# Altium PCB PCB1.PcbDoc (part 2 of 2)
Units mil, origin at the board's own origin, x right, y up, seen from the top; angles counter-clockwise.
Board outline 2362.2 x 2362.2 mil, 2 copper layers (Top Layer, Bottom Layer); 153 components, 106 nets, 570 pads, 334 vias.
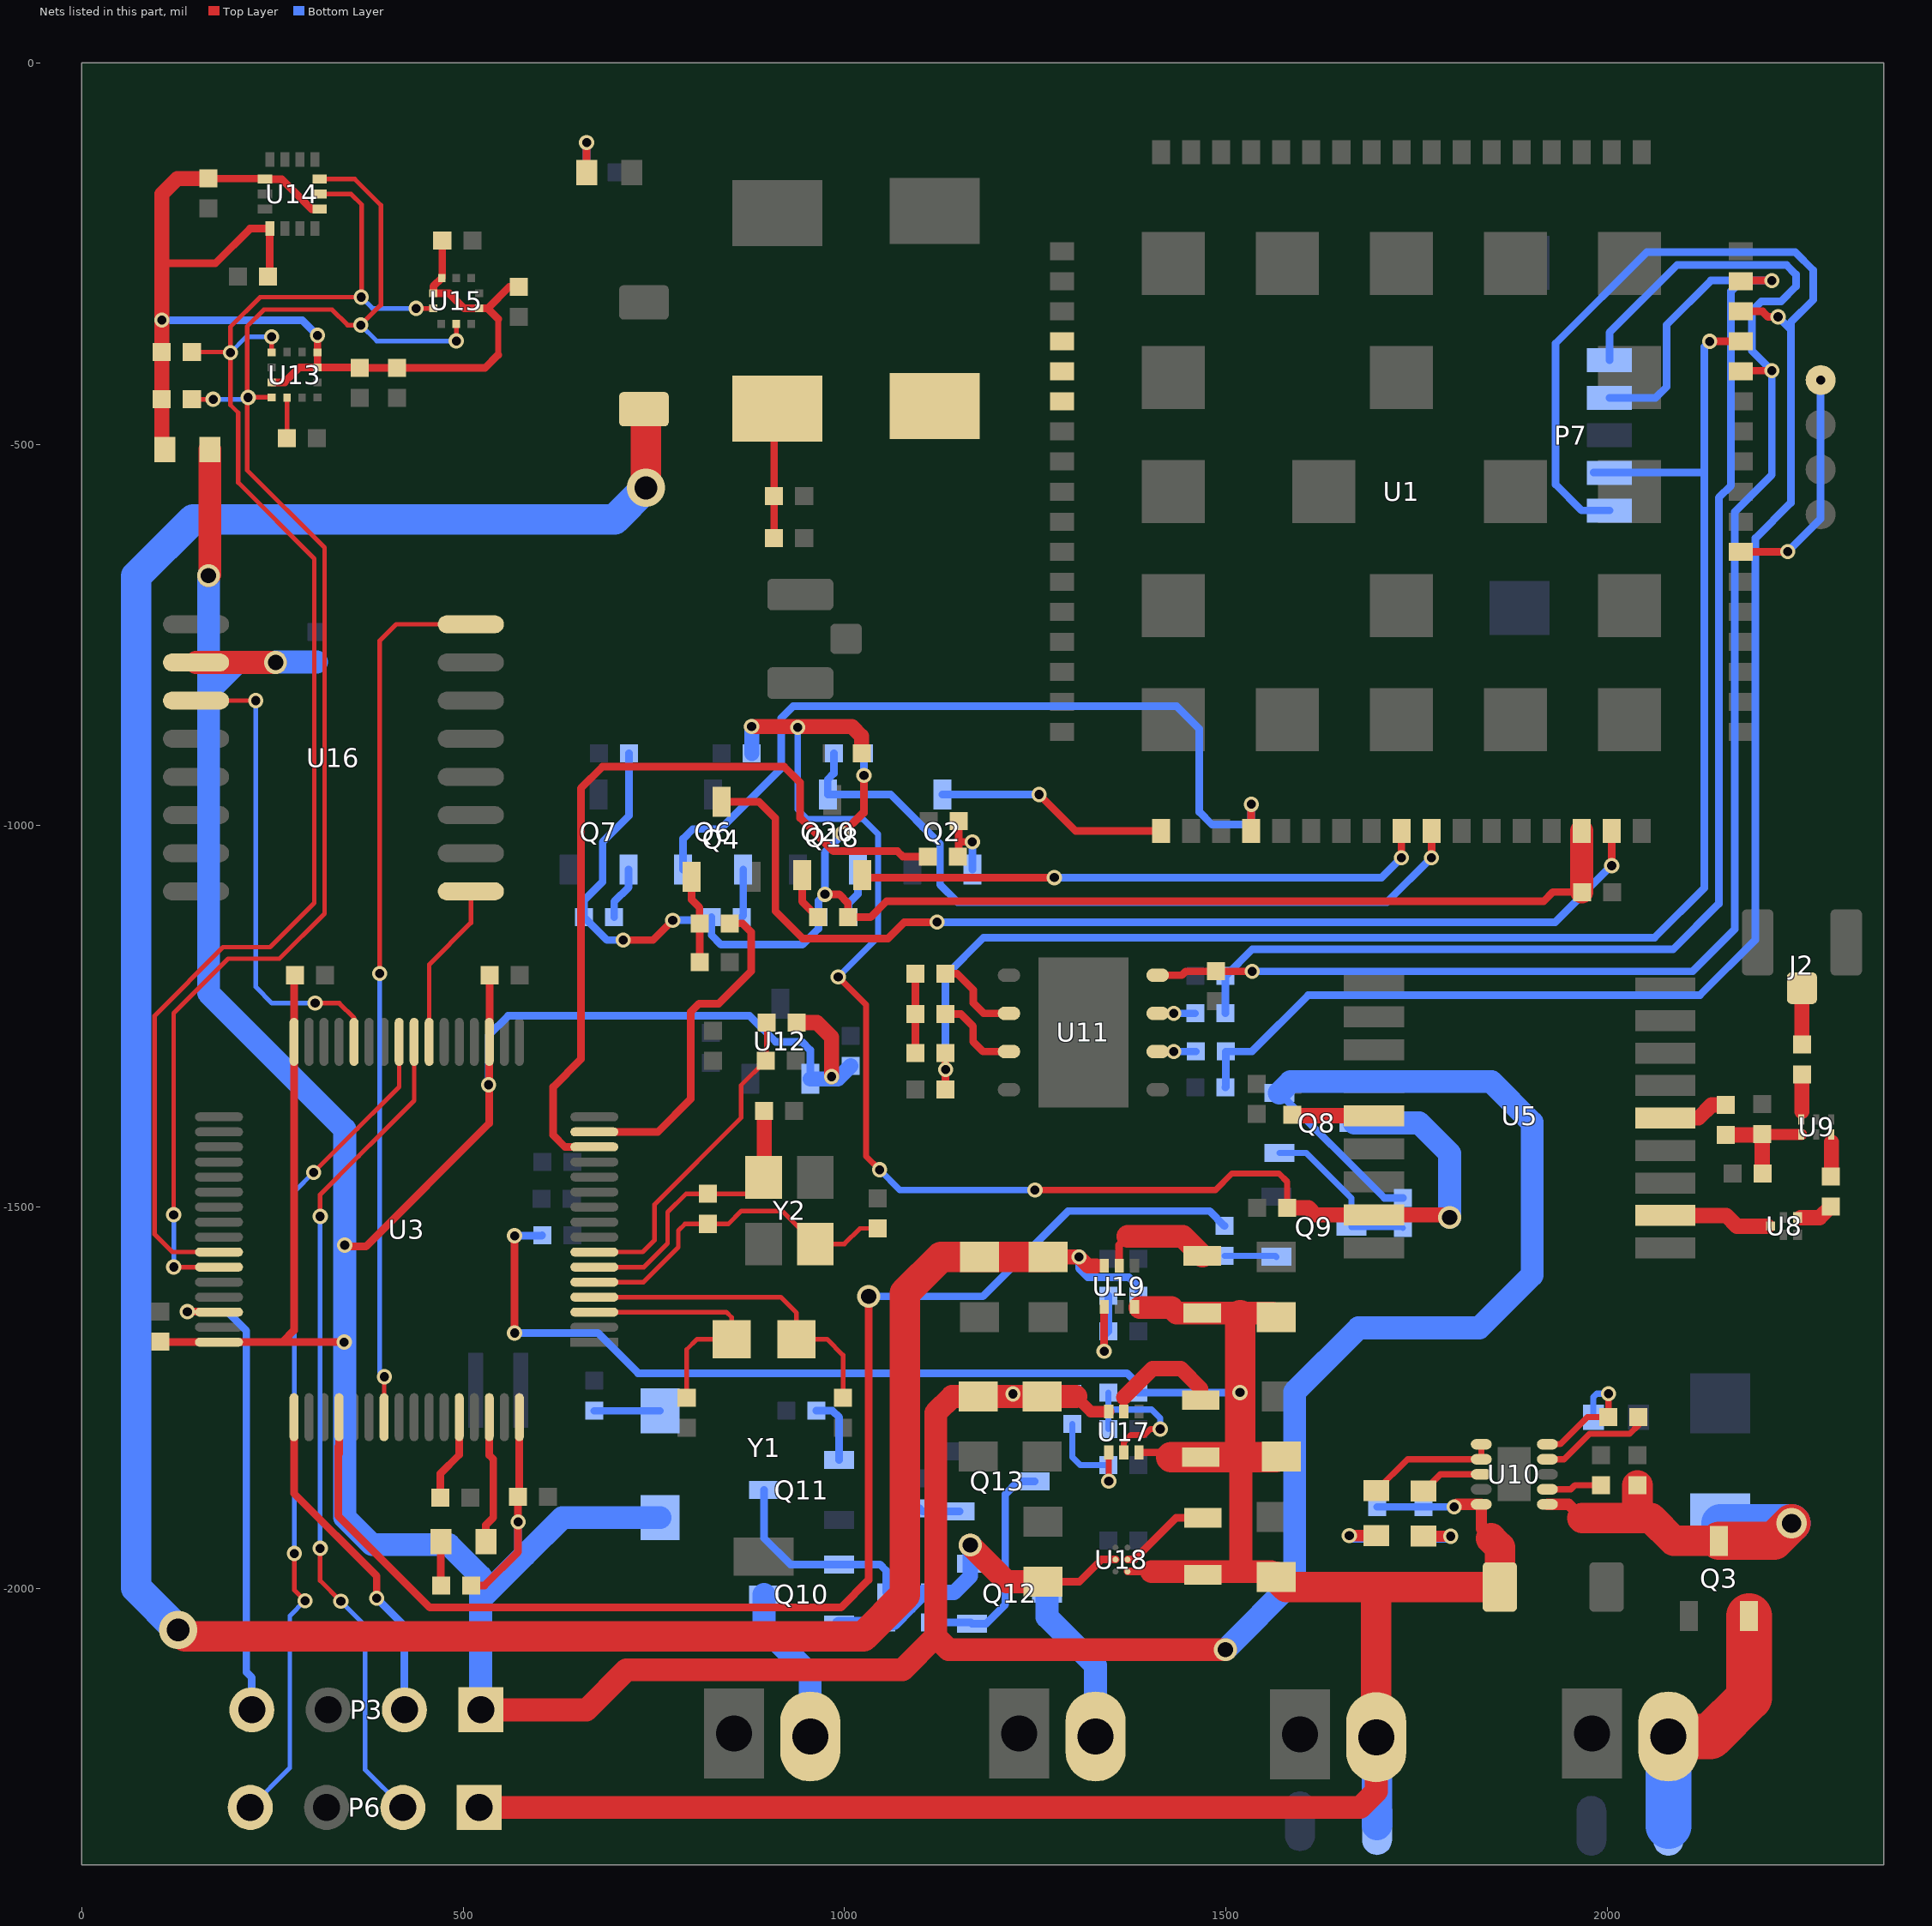
[diagram p2: the nets of this part, all layers, seen from the top]

## Via types
v1: diameter 20, hole 12, Top Layer to Bottom Layer, tented both sides, 324 vias
v2: diameter 30, hole 20, Top Layer to Bottom Layer, tented both sides, 6 vias
v3: diameter 50, hole 30, Top Layer to Bottom Layer, tented both sides, 2 vias
v4: diameter 25.98, hole 12.99, Top Layer to Bottom Layer, tented top, 1 vias
v5: diameter 40, hole 25, Top Layer to Bottom Layer, tented both sides, 1 vias

## Nets (pads, with @x,y where several pads share a name; then routed paths per layer and width w, separated by ;. In a path a pad name is that pad's centre, name@x,y a point inside that pad or via, vN(x,y) a via of type N, cw(c..) or ccw(c..) an arc to the next point about the centre after c; other vN are vias at no path point) (continued)
NetC4_2: C4.2 R1.1 U3.5 Y2.1 | length 449.3
  Top Layer w6: U3.5@672,-1598.26 736.31,-1598.26 782.09,-1552.48 782.09,-1530.83 790.91,-1522 R1.1@821,-1522 847.72,-1522 864.76,-1504.96 918.12,-1504.96 Y2.1@961.46,-1548.31 999.76,-1548.31 1020.12,-1527.95 C4.2@1043.62,-1527.95
NetC5_1: C5.1 U3.4 Y1.2 | length 433.6
  Top Layer w6: U3.4@672,-1617.94 916.37,-1617.94 937,-1638.57 Y1.2@937,-1673 976.9,-1673 998,-1694.1 C5.1@998,-1750
NetC6_2: C6.2 R1.2 U3.6 Y2.3 | length 381.8
  Top Layer w6: U3.6@672,-1578.57 736.94,-1578.57 768.07,-1547.44 768.07,-1506.69 792.13,-1482.63 R1.2@821,-1482.63 872.37,-1482.63 Y2.3@894,-1461
  Top Layer w20: Y2.3@894,-1461 894.63,-1460.37 C6.2@894.63,-1374
NetC7_1: C7.1 U3.3 Y1.1 | length 339.3
  Top Layer w6: U3.3@672,-1637.63 845.07,-1637.63 852,-1644.56 Y1.1@852,-1673 806.69,-1673 793,-1686.69 C7.1@793,-1750
NetC8_2: C8.2 R6.2 U3.7 | length 431.4
  Top Layer w6: U3.7@672,-1558.89 735.28,-1558.89 750.91,-1543.27 750.91,-1496.34 864.41,-1382.83 864.41,-1340.22 C8.2@896.63,-1308 897.63,-1307 R6.2@897.63,-1258
NetC22_1: C22.1 U8.4 | length 45.8
  Top Layer w20: U8.4@2253.31,-1513.68 2278.32,-1513.68 C22.1@2293,-1499
NetC22_2: C22.2 U9.6 | length 45.2
  Top Layer w20: C22.2@2293,-1459.63 2293.69,-1458.95 2293.69,-1414.68
NetC27_1: C27.1 D2.2 Q3.3 U10.1 | length 486.7
  Top Layer w15: U10.1@1921.31,-1889.56 1949.2,-1889.56 1967.28,-1907.64
  Top Layer w40: 1967.28,-1907.64 2041.61,-1907.64 ; C27.1@2039.37,-1864.76 2039.37,-1905.39 2041.61,-1907.64 ; Q3.3@2146.37,-1937.57 2087.1,-1937.57 2057.17,-1907.64 2041.61,-1907.64
  Top Layer w50: Q3.3@2146.37,-1937.57 2218.28,-1937.57 v5(2241.37,-1914.48)
  Bottom Layer w50: D2.2@2148,-1914.48 v5(2241.37,-1914.48)
NetC40_1: C40.1 U13.5 | length 53
  Top Layer w6: C40.1@269,-492 269.16,-491.84 U13.5@269.16,-439.02
NetD1_2: D1.2 R7.1 | length 86
  Bottom Layer w10: R7.1@672,-1767 D1.2@758,-1767
NetJ2_1: J2.1 L3.2 | length 73.6
  Top Layer w20: L3.2@2255,-1286.63 J2.1@2255,-1213.04
NetL2_1: L2.1 U5.14 | length 86.2
  Top Layer w20: U5.14@2075.89,-1383.23 2119.45,-1383.23 2136.68,-1366 L2.1@2155,-1366
NetL3_1: L3.1 U9.3 | length 48.8
  Top Layer w20: 2255,-1374.76 L3.1@2255,-1326
NetL4_1: L4.1 U17.5 | length 161.4
  Top Layer w10: U17.5@1366,-1768 1366,-1749.28
  Top Layer w20: 1366,-1749.28 1403.62,-1711.65 1440.91,-1711.65 1466.99,-1737.74 L4.1@1466.99,-1753.05
NetL5_2: L5.2 U18.B1 | length 121.6
  Top Layer w10: U18.B1@1370.87,-1962 1379.96,-1962 1434.76,-1907.2 L5.2@1469.74,-1907.2
NetL6_1: L6.1 U19.5 | length 151.6
  Top Layer w10: U19.5@1360,-1577 1360,-1549.72 1371.38,-1538.35
  Top Layer w30: 1371.38,-1538.35 1428.43,-1538.35 1443.35,-1538.35 L6.1@1469,-1564
NetLED1_2: LED1.2 R9.1 | length 78.5
  Top Layer w10: LED1.2@661.88,-143.75 v1(661.88,-104.48)
  Bottom Layer w10: R9.1@661.88,-143.75 v1(661.88,-104.48)
NetLED2_1: LED2.1 R29.2 | length 72.8
  Top Layer w15: v1(1661.58,-1930.51) LED2.1@1697.2,-1930.51
  Bottom Layer w15: v1(1661.58,-1930.51) 1663.44,-1932.37 R29.2@1698,-1932.37
NetLED2_2: LED2.2 U10.6 U10.7 | length 174.1
  Top Layer w8: LED2.2@1697.2,-1871.45 1738.16,-1830.5 U10.7@1834.69,-1830.5 U10.6@1834.69,-1810.82
NetLED4_1: LED4.1 R12.2 | length 71.7
  Top Layer w15: LED4.1@1759,-1931.4 v1(1794.62,-1931.4)
  Bottom Layer w15: R12.2@1759,-1932.37 1793.65,-1932.37 v1(1794.62,-1931.4)
NetLED4_2: LED4.2 U10.8 | length 84.9
  Top Layer w8: LED4.2@1759,-1872.34 1781.16,-1850.19 U10.8@1834.69,-1850.19
NetLED5_1: LED5.1 R65.1 | length 57.6
  Top Layer w10: LED5.1@470.67,-1938.58 470.67,-1995.67 R65.1@471,-1996
NetLED5_2: LED5.2 U3.62 | length 169.4
  Top Layer w10: LED5.2@529.72,-1938.58 529.72,-1916.57 539.49,-1906.81 539.49,-1830.39 534.2,-1825.11 U3.62@534.2,-1775.43
NetQ2_1: Q2.1 R10.1 R11.1 | length 101.8
  Top Layer w10: R10.1@1148.51,-1040.78 1149.51,-1039.78 1149.51,-1020.98 ; R11.1@1149.51,-993.78 1149.51,-1020.98 ; v1(1167.5,-1021.16) 1149.69,-1021.16 1149.51,-1020.98
  Bottom Layer w10: Q2.1@1167.5,-1057.51 v1(1167.5,-1021.16)
NetQ4_1: Q4.1 R4.1 R16.1 | length 116.4
  Top Layer w10: Q4.1@799.26,-1067 799.26,-1096.74 809.88,-1107.36 R16.1@809.88,-1128 810,-1128.12 R4.1@810,-1179
NetQ6_1: Q6.1 R28.1 | length 63.4
  Bottom Layer w10: R28.1@865,-1120 867.17,-1117.83 Q6.1@867.17,-1057.51
NetQ7_1: Q7.1 R31.1 | length 70.4
  Bottom Layer w10: R31.1@698,-1120 698,-1099.56 717,-1080.56 Q7.1@717,-1057.51
NetQ8_1: Q8.1 Q9.3 R33.2 | length 224.8
  Bottom Layer w8: Q8.1@1570,-1429 1605.22,-1429 1664.43,-1488.2 Q9.3@1664.43,-1525.89 1730.52,-1525.89 R33.2@1732,-1527.37
NetQ9_1: Q9.1 R34.1 | length 68.5
  Bottom Layer w8: R34.1@1498,-1564 1564.74,-1564 Q9.1@1566,-1565.26
NetQ10_1: Q10.1 Q11.3 R36.2 | length 269.3
  Bottom Layer w10: Q11.3@894.45,-1870.94 894.45,-1933.94 928.98,-1968.46 Q10.1@992.87,-1968.46 1046.5,-1968.46 1054.45,-1976.42 R36.2@1054.45,-2005.12
NetQ11_1: Q11.1 R37.1 | length 89.5
  Bottom Layer w10: R37.1@962.95,-1766.81 984.02,-1766.81 992.87,-1775.67 Q11.1@992.87,-1831.57
NetQ12_1: Q12.1 Q13.3 R50.2 | length 300
  Bottom Layer w10: R50.2@1112,-2044.37 1165.37,-2044.37 Q12.1@1167,-2046 1185.77,-2046 1210.63,-2021.14 1210.63,-1876.42 1227.6,-1859.45 Q13.3@1249.25,-1859.45
NetQ13_1: Q13.1 R51.1 | length 54
  Bottom Layer w10: R51.1@1098.46,-1894.92 1102.36,-1898.82 Q13.1@1150.83,-1898.82
NetQ18_1: Q18.1 R40.1 | length 63.6
  Top Layer w10: Q18.1@944.26,-1065 944.26,-1099.26 R40.1@965,-1120
NetQ20_1: Q20.1 R44.1 | length 67.6
  Bottom Layer w10: R44.1@1005,-1120 1005,-1102.01 1017.33,-1089.67 Q20.1@1017.33,-1057.51
NetR3_1: R3.1 U3.60 | length 115.9
  Top Layer w10: R3.1@470,-1881 470,-1849.49 494.83,-1824.65 U3.60@494.83,-1775.43
NetR13_1: R13.1 U10.2 | length 72.2
  Top Layer w8: U10.2@1921.31,-1869.87 1951.98,-1869.87 1957.09,-1864.76 R13.1@1991.37,-1864.76
NetR14_1: R14.1 R15.2 U10.5 | length 173.7
  Top Layer w8: U10.5@1921.31,-1810.82 1938.11,-1810.82 1973.54,-1775.39 R14.1@2001.37,-1775.39 v1(2001.37,-1744.52)
  Bottom Layer w8: R15.2@1981.69,-1775.39 1981.69,-1748.75 1985.91,-1744.52 v1(2001.37,-1744.52)
NetR14_2: R14.2 U10.4 | length 148.2
  Top Layer w8: U10.4@1921.31,-1830.5 1943.2,-1830.5 1976.66,-1797.04 2029.29,-1797.04 2040.74,-1785.59 R14.2@2040.74,-1775.39
NetR18_1: R18.1 U5.5 | length 107.5
  Top Layer w20: R18.1@1587,-1379 1588.23,-1380.23 U5.5@1694,-1380.23
NetR19_2: R19.2 R20.2 U19.1 | length 133.3
  Top Layer w10: v1(1340.32,-1688.82) U19.1@1340.32,-1630.57
  Bottom Layer w10: v1(1340.32,-1688.82) 1340.32,-1668.32 R20.2@1345.63,-1663 R19.2@1345.63,-1616
NetR21_2: R21.2 R48.2 U17.1 | length 153.8
  Top Layer w8: v1(1346.32,-1859.28) U17.1@1346.32,-1821.57
  Bottom Layer w8: R21.2@1298.74,-1784.29 1298.74,-1827.72 1309.02,-1838 R48.2@1345.63,-1838 1345.63,-1858.59 v1(1346.32,-1859.28)
NetR23_2: R23.2 U11.7 | length 49.2
  Top Layer w10: U11.7@1410.44,-1246 v1(1431.59,-1246)
  Bottom Layer w10: v1(1431.59,-1246) R23.2@1459.63,-1246
NetR25_1: R25.1 U11.3 | length 115.2
  Top Layer w10: R25.1@1132.41,-1247 1152.63,-1247 1168.5,-1262.87 1168.5,-1282.91 1181.59,-1296 1194.41,-1296 U11.3@1215.56,-1296
NetR25_2: R25.2 R26.2 R27.2 | length 104
  Top Layer w10: R27.2@1093.04,-1298 R25.2@1093.04,-1247 R26.2@1093.04,-1194
NetR26_1: R26.1 U11.2 | length 114.7
  Top Layer w10: R26.1@1132.41,-1194 1147.43,-1194 1168.79,-1215.37 1168.79,-1232.38 1182.42,-1246 U11.2@1215.56,-1246
NetR35_2: R35.2 R49.2 U17.2 | length 200.7
  Top Layer w8: U17.2@1366,-1821.57 1366,-1808.07 1375.14,-1798.93 1392.73,-1798.93 1400.79,-1790.87 v1@1410.98,-1790.87
  Bottom Layer w8: R35.2@1345.63,-1791 1345.63,-1765.32 ; R49.2@1345.63,-1743 1345.63,-1755.11 1345.63,-1765.32 ; v1(1413.74,-1790.87) 1413.74,-1776.62 1402.44,-1765.32 1345.63,-1765.32
NetR39_2: R39.2 U11.6 | length 50.2
  Top Layer w10: U11.6@1410.44,-1296 v1(1431.59,-1296)
  Bottom Layer w10: v1(1431.59,-1296) R39.2@1460.63,-1296
POWER_CTRL_GPS: R34.2 U3.52 | length 1790.6
  Top Layer w10: 336.22,-1814.17 336.22,-1904.72 456.38,-2024.88 767.95,-2024.88 995.28,-2024.88 1031.5,-1988.66 v2(1031.5,-1617.01) ; 337.35,-1822.84 U3.52@337.35,-1775.43
  Bottom Layer w10: v2(1031.5,-1617.01) 1181.14,-1617.01 1292.99,-1505.16 1302.13,-1505.16 1478.53,-1505.16 R34.2@1498,-1524.63
PWRKEY: Q2.3 U1.1 | length 312.1
  Top Layer w10: v1(1255.08,-959.09) 1302.87,-1006.88 1385.39,-1006.88 ; 1380.03,-1006.88 1385.39,-1006.88 ; U1.1@1415.04,-1006.88 1398.58,-1006.88 1385.39,-1006.88
  Bottom Layer w10: Q2.3@1128.13,-959.09 v1(1255.08,-959.09)
RESET: Q4.3 U1.16 | length 1397.5
  Top Layer w10: Q4.3@838.63,-968.57 887.67,-968.57 909.29,-990.2 909.29,-1111.97 945.05,-1147.72 1057.04,-1147.72 1078.35,-1126.42 v1(1121.14,-1126.42) ; v1(2005.59,-1052.32) U1.16@2005.59,-1006.88
  Bottom Layer w10: v1(1121.14,-1126.42) 1931.5,-1126.42 v1(2005.59,-1052.32)
RF_IN: U5.11 U8.1 | length 140
  Top Layer w20: U5.11@2075.89,-1510.9 2155.66,-1510.9 2169.76,-1525 U8.1@2210,-1525
RI: Q6.2 U1.4 | length 1081.8
  Top Layer w10: U1.4@1533.15,-1006.88 v1(1533.15,-971.87)
  Bottom Layer w10: Q6.2@788.43,-1057.51 788.43,-1017.12 801.18,-1004.37 837.36,-1004.37 916.73,-925 916.73,-859.25 932.76,-843.23 1189.06,-843.23 1435.08,-843.23 1465.16,-873.31 1465.16,-982.05 1481.57,-998.46 1527.28,-998.46 1533.15,-992.6 v1(1533.15,-971.87)
RXD3: P6.4 U3.25 | length 1096
  Top Layer w6: v1(278.82,-1954.09) 278.82,-2002.13 v1(292.68,-2015.98) ; v1(303.9,-1454.53) 361.38,-1397.05 398.73,-1359.7 416.09,-1342.33 U3.25@416.09,-1283.3
  Bottom Layer w6: P6.4@221,-2287 272.83,-2235.17 272.83,-2035.83 v1(292.68,-2015.98) ; v1(278.82,-1954.09) 278.82,-1479.61 v1(303.9,-1454.53)
SCL: R22.2 U3.42 U13.1 U14.13 U15.2 | length 2053.3
  Top Layer w6: R22.2@144.38,-379 v1@194.46,-379 ; U3.42@179.87,-1558.89 118.69,-1558.89 95.55,-1535.75 95.55,-1249.03 185.31,-1159.27 246.83,-1159.27 304.8,-1101.31 304.8,-649.87 205.04,-550.12 205.04,-458.54 194.96,-448.46 v1(194.96,-379.84) ; v1@194.96,-378.5 194.96,-345.91 233.86,-307.01 v1(366.3,-307.01) ; U13.1@248.98,-379.47 v1(248.98,-359.09) ; U14.13@311.83,-172 353.1,-172 367.05,-185.94 v1@367.05,-306.26 ; v1(438.42,-321.84) U15.2@460.98,-321.84
  Bottom Layer w6: v1(194.96,-379.84) 215.71,-359.09 v1(248.98,-359.09) ; v1(366.3,-307.01) 381.13,-321.84 v1(438.42,-321.84)
SCLK: U3.55 U16.16 | length 1149
  Top Layer w6: v1(390.47,-1193.78) 390.47,-757.72 412.19,-736 U16.16@510.12,-736 ; U3.55@396.41,-1775.43 396.41,-1722.53 v1(396.65,-1722.28)
  Bottom Layer w6: v1(390.47,-1193.78) 390.47,-1716.1 v1(396.65,-1722.28)
SDA: R24.1 U3.43 U13.4 U14.14 U15.4 | length 2148.8
  Top Layer w6: v1(120.43,-1510.04) 120.43,-1245.88 191.9,-1174.42 259.05,-1174.42 318.35,-1115.12 318.35,-635.39 216.89,-533.94 v1@216.89,-439.8 ; v1(120.62,-1578.57) U3.43@179.87,-1578.57 ; R24.1@144.38,-441 v1(172.31,-441) ; U13.4@248.98,-438.53 v1(218.17,-438.53) v1@216.89,-439.8 ; U14.14@311.83,-152.32 357.98,-152.32 392.17,-186.5 392.17,-317.4 v1(365.79,-343.78) 348.5,-343.78 328.07,-323.35 238.98,-323.35 216.89,-345.43 v1@216.89,-439.8 ; v1(491,-364.58) U15.4@491,-342.02
  Bottom Layer w6: v1(120.43,-1510.04) 120.62,-1510.23 v1(120.62,-1578.57) ; v1(172.31,-441) 215.69,-441 v1(218.17,-438.53) ; v1(365.79,-343.78) 386.59,-364.58 v1(491,-364.58)
SIM_CLK: C17.2 P7.1 R39.1 U1.32 | length 2453.6
  Top Layer w10: U1.32@2174.88,-325.78 2203.31,-325.78 2210.53,-333 v1(2223.78,-333)
  Bottom Layer w10: C17.2@1499.37,-1343 1500,-1342.37 R39.1@1500,-1296 1533.92,-1296 1607.76,-1222.17 2121.38,-1222.17 2194.09,-1149.45 2194.09,-623.07 2240.43,-576.73 2240.43,-349.65 ; P7.1@2002.8,-586.77 1966.14,-586.77 1932.01,-552.64 1932.01,-367.8 2051.65,-248.15 2246.34,-248.15 2269.84,-271.65 2269.84,-310.63 2240.43,-340.04 2240.43,-349.65 ; v1(2223.78,-333) 2240.43,-349.65
SIM_DATA: C18.2 P7.2 R27.1 U1.31 | length 2149.8
  Top Layer w10: C18.2@1132.41,-1346 R27.1@1132.41,-1298 ; v1(2134.06,-365.15) U1.31@2174.88,-365.15
  Bottom Layer w10: v1(1132.41,-1319.57) 1132.41,-1196.57 1182.13,-1146.85 2061.77,-1146.85 2127.2,-1081.42 2127.2,-539.8 ; P7.2@1982.09,-536.85 2039.07,-536.85 ; 2069.09,-536.85 2039.07,-536.85 ; v1(2134.06,-365.15) 2127.2,-372.01 2127.2,-539.8 ; 2039.07,-536.85 2124.25,-536.85 2127.2,-539.8
SIM_PWR: R10.2 U3.14 | length 1113.3
  Top Layer w10: 654.29,-1058.78 654.29,-1018.37 ; U3.14@672,-1421.09 633.57,-1421.09 617.95,-1405.47 617.95,-1342.48 654.29,-1306.14 654.29,-1018.37 ; R10.2@1109.14,-1040.78 1076.61,-1040.78 1069.25,-1033.43 985.24,-1033.43 941.75,-989.94 941.75,-943.49 920.83,-922.56 682.72,-922.56 654.29,-950.98 654.29,-1018.37
SIM_RST: C16.2 P7.4 R23.1 U1.33 | length 1929.2
  Top Layer w10: U1.33@2174.88,-285.39 v1(2215.54,-285.39)
  Bottom Layer w10: R23.1@1499,-1246 1499.37,-1245.63 C16.2@1499.37,-1197 1534.36,-1162.01 2086.26,-1162.01 2146.06,-1102.2 2146.06,-569.96 2162.12,-553.91 2162.12,-299.42 2176.14,-285.39 ; P7.4@2002.8,-439.13 2063.31,-439.13 2077.6,-424.84 2077.6,-343.39 2135.59,-285.39 2176.14,-285.39 ; v1(2215.54,-285.39) 2176.14,-285.39
SIM_RST1: R16.2 U3.15 | length 443.9
  Top Layer w10: U3.15@672,-1401.41 755.13,-1401.41 798.54,-1357.99 798.54,-1244.02 809.35,-1233.21 835.06,-1233.21 877.49,-1190.78 877.49,-1139.33 866.16,-1128 R16.2@849.25,-1128
SIM_RXD: Q20.3 R46.1 U1.10 | length 997.8
  Top Layer w10: v1(1769.37,-1041.89) U1.10@1769.37,-1006.88
  Bottom Layer w10: R46.1@986,-905 986,-931.36 977.96,-939.4 Q20.3@977.96,-959.09 1060.43,-959.09 1125.16,-1023.82 1125.16,-1077.32 1148.03,-1100.2 1711.06,-1100.2 v1(1769.37,-1041.89)
SIM_TXD: Q18.2 U1.9 | length 754.1
  Top Layer w10: Q18.2@1023,-1065 1025.99,-1067.99 v1(1275,-1067.99) ; v1(1730,-1041.89) U1.9@1730,-1006.88
  Bottom Layer w10: v1(1275,-1067.99) 1703.9,-1067.99 v1(1730,-1041.89)
SIM_VDD: C14.2 P7.5 U1.30 U11.8 | length 2082.4
  Top Layer w10: U11.8@1410.44,-1196 1442.23,-1196 1447.35,-1190.88 C14.2@1487,-1190.88 v1(1534.46,-1190.88) ; U1.30@2174.72,-403.5 v1(2215.54,-403.5)
  Bottom Layer w10: v1(1534.46,-1190.88) 2111.72,-1190.88 2167.13,-1135.47 2167.13,-588.39 2215.54,-539.97 v1(2215.54,-403.5) 2189.29,-377.25 2189.29,-325.08 2201.5,-312.87 2227.44,-312.87 2247.28,-293.03 2247.28,-277.48 2234.76,-264.96 2183.19,-264.96 ; P7.5@2002.8,-389.92 2002.8,-353.54 2091.38,-264.96 2183.19,-264.96 ; 2192.17,-264.96 2183.19,-264.96
SPI_RESET: U3.28 U16.3 | length 630.7
  Top Layer w6: U16.3@149.88,-836 v1(228.21,-836) ; v1@307.52,-1232.6 337.6,-1232.6 357.04,-1252.04 U3.28@357.04,-1283.3
  Bottom Layer w6: v1(228.21,-836) 228.21,-1211.4 249.41,-1232.6 v1@307.52,-1232.6
  other v1: 305.98,-1232.6
SWCLK: P3.2 U3.49 | length 443.5
  Top Layer w10: U3.49@278.3,-1775.43 278.3,-1875.27 386.57,-1983.54 v1(386.57,-2012.56)
  Bottom Layer w10: v1(386.57,-2012.56) 423,-2048.98 P3.2@423,-2159
SWD: P3.4 U3.46 | length 629.5
  Top Layer w10: v1(138.39,-1637.09) 179.33,-1637.09 U3.46@179.87,-1637.63
  Bottom Layer w10: v1(138.39,-1637.09) 190.94,-1637.09 215.8,-1661.95 215.8,-1970.91 215.8,-2109.46 223,-2116.65 P3.4@223,-2159
TXD3: P6.2 U3.24 | length 1100.9
  Top Layer w6: v1(312.6,-1947.32) 312.6,-1989.61 v1(339.65,-2016.65) ; v1@312.6,-1513.39 312.6,-1483.5 362.87,-1433.23 390.28,-1405.82 435.78,-1360.32 U3.24@435.78,-1283.3
  Bottom Layer w6: v1(312.6,-1947.32) v1(312.6,-1512.13) ; v1(339.65,-2016.65) 371.38,-2048.39 371.38,-2237.38 P6.2@421,-2287
VBAT: C44.1 C45.1 C49.1 D4.2 L4.2 L5.1 L6.2 P2.2 P6.1 R2.1 R12.1 R29.1 R49.1 T17.1 U10.10 U17.3 U18.A1 U19.3 | length 4173.7
  Top Layer w10: v1(567.44,-1665) v1(567.44,-1537.6) ; U18.A1@1370.87,-1977.75 1402.61,-1977.75 ; U17.3@1386,-1821.57 1410.87,-1821.57 1417.14,-1827.85 1428.23,-1827.85 ; L4.2@1466.99,-1827.85 L4.2@1469,-1827.85
  Top Layer w15: v1(1799.09,-1893) 1802.53,-1889.56 U10.10@1834.69,-1889.56 1834.69,-1921.74 1847.24,-1934.29
  Top Layer w30: P6.1@521,-2287 1675.65,-2287 1697,-2265.65 P2.2@1697,-2194.94 ; 1387.17,-1631.75 1428.32,-1631.75 1435.38,-1638.8 L6.2@1469,-1638.8 1560.8,-1638.8 C49.1@1566,-1644 ; 1402.61,-1977.75 1519.57,-1977.75 ; 1519.57,-1828.88 1519.57,-1977.75 ; C45.1@1566,-1984.74 1559.01,-1977.75 1519.57,-1977.75
  Top Layer w40: 1428.23,-1827.85 L4.2@1466.99,-1827.85 ; L4.2@1469,-1827.85 1518.54,-1827.85 ; 1518.54,-1641.91 1518.54,-1827.85 ; C45.1@1566,-1984.74 1579.26,-1998 D4.2@1859,-1998 1859,-1946.05 1847.24,-1934.29 ; C44.1@1566,-1827.05 1565.2,-1827.85 1518.54,-1827.85 ; P2.2@1697,-2194.94 1697,-2000.28
  Bottom Layer w10: v1(567.44,-1665) 676.65,-1665 729.33,-1717.68 1370.12,-1717.68 1385,-1732.56 R49.1@1385,-1743 v1(1518.38,-1743) ; v1(567.44,-1537.6) 603.03,-1537.6 R2.1@603.63,-1537 ; R29.1@1698,-1893 R12.1@1759,-1893 v1(1799.09,-1893)
  Bottom Layer w40: P2.2@1697,-2194.94 1698,-2195.94 T17.1@1698,-2310
VBAT_OUT: C24.2 C29.1 C31.1 C43.2 C47.1 C48.1 D3.2 R19.1 U1.55 U1.56 U1.57 U19.6 | length 4397.7
  Top Layer w10: C24.2@907.63,-623 C43.2@907.63,-568 907.63,-457.37 C29.1@912,-453
  Top Layer w20: C48.1@1267,-1565.26 v1(1307.39,-1565.26) 1319.13,-1577 1329.88,-1577
  Top Layer w40: v3(126.42,-2054.13) 135.16,-2062.87 1024.49,-2062.87 1079.21,-2008.15 1079.21,-1612.6 1126.55,-1565.26 C47.1@1177,-1565.26 C48.1@1267,-1565.26 ; D3.2@737,-454 739.72,-456.72 v3(739.72,-557.13)
  Bottom Layer w10: v1(1307.39,-1565.26) 1307.39,-1580.46 1318.94,-1592.01 1373.03,-1592.01 1385,-1603.98 R19.1@1385,-1616
  Bottom Layer w40: v3(126.42,-2054.13) 71.5,-1999.21 71.5,-1678.09 71.5,-672.87 145.98,-598.39 394.59,-598.39 ; 631.69,-598.39 394.59,-598.39 ; v3(739.72,-557.13) 698.46,-598.39 394.59,-598.39
VBUS: T1.1 U1.24 | length 304.3
  Top Layer w10: U1.24@2174.88,-640.74 v1(2236.39,-640.74)
  Bottom Layer w10: v1(2236.39,-640.74) 2279.53,-597.6 v1(2279.53,-415.82)
VCC_3.3V_S: C32.2 Q8.3 R30.2 R42.2 U5.8 | length 1954.2
  Top Layer w8: v1(991.65,-1198.15) 1028.27,-1234.76 1028.27,-1331.01 1028.27,-1433.43 v1(1045.87,-1451.02) ; v1(1249.57,-1477.6) 1486.14,-1477.6 1507.76,-1455.98 1569.53,-1455.98 1580.37,-1466.83 C32.2@1580.37,-1501
  Top Layer w20: v1(878.23,-870.08) 1009.65,-870.08 1022.37,-882.8 R42.2@1022.37,-905 ; C32.2@1580.37,-1501 1608.36,-1501 1617.51,-1510.15 U5.8@1694,-1510.15 1789.76,-1510.15 v2(1793.27,-1513.66)
  Bottom Layer w8: v1(938.58,-871.22) 938.58,-892.48 ; 939.02,-892.05 938.58,-892.48 ; v1(991.65,-1198.15) 1043.86,-1145.94 1043.86,-1010.98 1024.09,-991.22 950.98,-991.22 938.58,-978.82 938.58,-892.48 ; v1@1045.85,-1451.04 1072.4,-1477.6 v1(1249.57,-1477.6)
  Bottom Layer w20: v1(878.23,-870.08) 878.37,-870.22 R30.2@878.37,-905
  Bottom Layer w30: Q8.3@1668.43,-1389.63 1753.09,-1389.63 1793.27,-1429.8 v2(1793.27,-1513.66)
VCC_3V: C11.2 C12.2 C13.2 C15.2 C28.1 C34.1 C37.1 C50.2 D1.1 FB2.1 P3.1 Q8.2 R6.1 R21.1 R33.1 R65.2 U3.19 U3.32 U3.48 U3.64 U12.1 U16.2 U17.6 | length 7771.7
  Top Layer w10: C13.2@103,-1676.37 103.63,-1677 U3.48@179.87,-1677 262.84,-1677 ; C15.2@279.63,-1196 278.3,-1197.33 U3.32@278.3,-1283.3 278.3,-1661.54 262.84,-1677 ; v1(344.05,-1677) 262.84,-1677 ; v1@344.84,-1551.69 372.56,-1551.69 534.2,-1390.05 U3.19@534.2,-1283.3 534.63,-1282.87 C11.2@534.63,-1196 ; R65.2@510.37,-1996 527.98,-1996 572.05,-1951.93 v1(572.05,-1912.64) C12.2@572.05,-1879.96 573.57,-1878.43 U3.64@573.57,-1775.43
  Top Layer w15: 1303.11,-1748.31 1322.8,-1768 U17.6@1346.32,-1768
  Top Layer w20: R6.1@937,-1258 963.91,-1258 983.03,-1277.13 v1(983.03,-1328.94)
  Top Layer w30: U16.2@149.88,-786 v2(254.15,-786) ; v2(166.18,-672.13) 168,-670.31 FB2.1@168,-507 ; P3.1@523,-2159 661.59,-2159 714.06,-2106.54 1076.06,-2106.54 1119.49,-2063.11 ; 1303.11,-1748.31 C28.1@1259,-1748.31 C34.1@1175,-1748.31 1140.94,-1748.31 1119.49,-1769.76 1119.49,-2063.11 ; v2(1499.29,-2080.16) 1136.54,-2080.16 1119.49,-2063.11
  Bottom Layer w10: v1(533.31,-1339.68) 533.31,-1274.88 558.98,-1249.21 755.08,-1249.21 875.47,-1249.21 878.44,-1252.18 909.61,-1283.35 944.21,-1283.35 955,-1294.13 U12.1@955,-1332 ; v1(572.05,-1912.64) 572.05,-1947.15 581.01,-1956.11 ; v1(1220.67,-1744.92) R21.1@1298.74,-1744.92 ; Q8.2@1570,-1350.26 1707.74,-1488 R33.1@1732,-1488
  Bottom Layer w20: U12.1@955,-1332 991,-1332 C37.1@1008,-1315
  Bottom Layer w30: v2(166.18,-672.13) 166.18,-823.98 ; C50.2@307.93,-785.45 254.7,-785.45 v2(254.15,-786) 204.16,-786 166.18,-823.98 ; P3.1@523,-2159 523,-2014.13 ; D1.1@758,-1907 630.13,-1907 581.01,-1956.11 523,-2014.13 ; v2(1499.29,-2080.16) 1589.96,-1989.49 1589.96,-1742.32 1673.9,-1658.39 1831.97,-1658.39 1901.26,-1589.09 1901.26,-1388.82 1847.99,-1335.55 1584.71,-1335.55 Q8.2@1570,-1350.26 ; 166.18,-823.98 166.18,-1219.21 344.84,-1397.87 v1(344.84,-1549.76) 344.84,-1906.69 380.67,-1942.52 481.5,-1942.52 523,-1984.02 523,-2014.13
VCC_3V_SENSOR: C35.2 C36.2 C38.2 C39.2 C41.2 C42.2 FB2.2 R22.1 R24.2 U13.3 U13.9 U13.10 U14.5 U14.8 U14.12 U15.1 U15.6 U15.10 | length 1631.2
  Top Layer w8: 545.87,-382.8 545.87,-335.65
  Top Layer w10: 105.01,-262.68 175.24,-262.68 220.64,-217.28 U14.8@246.47,-217.28 246.47,-277.9 C38.2@244.37,-280 ; C39.2@166,-151.63 239.49,-151.63 U14.5@240.17,-152.32 261.92,-152.32 301.29,-191.68 U14.12@311.83,-191.68 ; U13.3@248.98,-418.84 266,-418.84 285.68,-399.16 U13.9@309.02,-399.16 ; v1(309.02,-357.25) U13.10@309.02,-379.47 U13.9@309.02,-399.16 ; C36.2@472.63,-233 472.63,-281.35 U15.10@472,-281.98 460.98,-293 U15.1@460.98,-302.16 481.76,-302.16 501.45,-321.84 U15.6@521.02,-321.84 532.06,-321.84 ; 545.87,-382.8 528.84,-399.82 C42.2@413.25,-399.82 C41.2@364.25,-399.82 363.59,-399.16 U13.9@309.02,-399.16 ; 545.87,-335.65 532.06,-321.84 ; C35.2@573,-293.63 560.27,-293.63 532.06,-321.84
  Top Layer w20: FB2.2@108.94,-507 105.01,-503.06 R24.2@105.01,-441 R22.1@105.01,-379 105.01,-262.68 105.01,-171.92 125.3,-151.63 C39.2@166,-151.63
  Bottom Layer w10: v1@105.2,-337.52 289.29,-337.52 v1(309.02,-357.25)
  other v1: 105.01,-337.2
VCC_5V: C46.1 Q10.2 Q12.2 R36.1 R50.1 U18.B2 | length 473.3
  Top Layer w10: C46.1@1260,-1991 1307.78,-1991 1336.78,-1962 U18.B2@1355.13,-1962
  Top Layer w30: v2(1164.72,-1942.99) 1212.73,-1991 C46.1@1260,-1991
  Bottom Layer w10: R50.1@1110.75,-2005 R50.1@1112,-2005
  Bottom Layer w20: Q10.2@992.87,-2047.2 1051.73,-2047.2 R36.1@1054.45,-2044.49 1064.13,-2044.49 1085.12,-2023.5 1085.12,-2023.23 R50.1@1103.35,-2005 ; R50.1@1110.75,-2005 R50.1@1103.35,-2005 ; v2(1164.72,-1942.99) 1164.72,-1983.86 1143.58,-2005 R50.1@1112,-2005 R50.1@1103.35,-2005
  Bottom Layer w30: v2(1164.72,-1942.99) v2@1167,-1945.27
VCC_5V1: P5.2 Q10.3 | length 211.2
  Bottom Layer w30: Q10.3@894.45,-2007.83 894.45,-2051.69 955,-2112.24 P5.2@955,-2193.94
VCC_5V2: P4.2 Q12.3 | length 213.6
  Bottom Layer w30: Q12.3@1265.43,-2006.63 1265.43,-2037.24 1329,-2100.81 P4.2@1329,-2193.94
VCC_IN: P1.2 Q3.2 T15.1 | length 351
  Top Layer w60: P1.2@2080,-2193.94 2134.92,-2193.94 2185.74,-2143.12 Q3.2@2185.74,-2036
  Bottom Layer w60: T15.1@2080,-2311 P1.2@2080,-2193.94
VCC_RF: C23.2 C25.2 L2.2 U9.4 | length 151.7
  Top Layer w15: C25.2@2203.47,-1404.84 U9.4@2254.31,-1404.84
  Top Layer w20: L2.2@2155,-1405.37 2202,-1405.37 C25.2@2203,-1404.37 ; C23.2@2203.37,-1456 2203,-1455.63 C25.2@2203,-1404.37 ; C25.2@2203.47,-1404.84 C25.2@2203,-1404.37
VDD_EXT: C33.2 R28.2 R31.2 R32.2 R40.2 R44.2 R46.2 U1.15 | length 1992.1
  Top Layer w10: v1@708.7,-1149.89 748.85,-1149.89 v1(774.76,-1123.98) ; v1(974.29,-1089.92) 992.91,-1089.92 1004.37,-1101.38 R40.2@1004.37,-1120 1034.17,-1120 1055.12,-1099.06 1916.42,-1099.06 1928.47,-1087 C33.2@1966.63,-1087 ; v1(997.01,-1010.39) 1025.37,-982.03 ; 1012.24,-996.18 1025.37,-983.06 1025.37,-982.03 ; v1(1025.37,-934.15) 1025.37,-972.43 1025.37,-982.03
  Top Layer w30: U1.15@1966.22,-1006.88 1966.22,-1086.59 C33.2@1966.63,-1087
  Bottom Layer w10: v1@708.7,-1149.89 688.52,-1149.89 R31.2@658.63,-1120 658.63,-1097.75 682.84,-1073.53 682.84,-1021.41 717.37,-986.88 R32.2@717.37,-905 ; v1(774.76,-1123.98) 821.65,-1123.98 R28.2@825.63,-1120 825.63,-1143.43 838.15,-1155.94 944.72,-1155.94 965.63,-1135.04 R44.2@965.63,-1120 965.63,-1098.58 v1(974.29,-1089.92) 974.29,-1034.13 v1@997.52,-1010.91 ; v1(1025.37,-934.15) R46.2@1025.37,-905
  other v1: 709.76,-1149.89
WP: U3.23 U16.9 | length 219.9
  Top Layer w6: U3.23@455.46,-1283.3 455.46,-1182.02 510.12,-1127.36 U16.9@510.12,-1086
pads on no net: P7. P7.0 U1.5 U1.6 U1.7 U1.8 U1.11 U1.12 U1.13 U1.14 U1.19 U1.20 U1.21 U1.22 U1.23 U1.25 U1.26 U1.34 U1.35 U1.36 U1.37 U1.38 U1.40 U1.41 U1.42 U1.43 U1.44 U1.47 U1.48 U1.49 U1.50 U1.51 U1.53 U1.66 U1.67 U1.68 U3.9 U3.10 U3.11 U3.20 U3.26 U3.27 U3.29 U3.30 U3.33 U3.34 U3.35 U3.36 U3.37 U3.38 U3.39 U3.40 U3.41 U3.51 U3.56 U3.61 U5.4 U5.6 U5.7 U5.9 U5.15 U5.16 U5.17 U5.18 U10.9 U11.4 U11.5 U13.2 U13.7 U13.11 U13.12 U14.4 U14.9 U14.10 U14.11 U15.7 U16.1 U16.4 U16.5 U16.6 U16.11 U16.12 U16.13 U16.14 Y1.3
copper on no net:
  other v1: 198.62,-1135.16
  other v4: 1313,-1271

## Polygon pours and split planes (outlines as drawn)
AGND on Top Layer "Mid-Layer 1-No Net" (solid, remove dead copper, pour order 1000): -192.39,129.91 -181.83,119.36 2565.8,119.36 2565.8,-2378.79 2474.43,-2470.17 2439.27,-2435.01 -76.44,-2435.01 -76.44,-2312.02 -97.5,-2290.95 -126.76,-2261.7 -126.76,117.55
AGND on Bottom Layer "Mid-Layer 1-No Net" (solid, remove dead copper, pour order 1001): 164.64,211.46 174.52,201.58 2533.73,201.58 2533.73,-2212 2281.49,-2464.25 2147.94,-2597.79 -206.31,-2597.79 -206.31,-2296.1 -260.72,-2241.69 -216.23,-2197.2 -216.23,143.31 96.49,143.31 164.64,211.46

## Keep-outs
Keep-Out Layer:
  lines w5: 4.96,-2358.1 2356.26,-2358.1 2356.26,-4.76 4.96,-4.76 4.96,-2358.1

## Other copper
Top Layer:
  region net VCC_5V: 1238.86,-1971.06 1287.76,-1971.06 1294.76,-1978.07 1310.63,-1978.07 1331.61,-1957.09 1336.78,-1957.09 1336.78,-1975.31 1307.09,-2005 1292.2,-2005 1286.65,-2010.55 1244.96,-2010.55 1238.86,-2004.45
  region net NetL5_2: 1491.85,-1893.78 1431.42,-1893.78 1385.67,-1939.53 1385.67,-1957.72 1396.14,-1957.72 1431.06,-1922.8 1492.99,-1922.8 1496.34,-1919.45 1496.34,-1898.27
  region net VBAT_OUT: 707.36,-420.71 798.58,-420.71 821.06,-398.23 1198.27,-398.23 1245.39,-351.1 1301.38,-351.1 1304.72,-354.45 1304.72,-454.92 1301.06,-458.58 1264.13,-458.58 1221.61,-501.1 712.89,-501.1 699.45,-487.66 699.45,-428.62
Bottom Layer:
  pour cut-out: 216.42,-108.23 216.69,-107.95 324.57,-107.95 340.39,-123.78 340.39,-233.19 332.95,-240.63 222.95,-240.63 216.42,-234.09
  pour cut-out: 427.95,-255.04 428.23,-254.76 536.1,-254.76 551.93,-270.59 551.93,-364.58 427.95,-364.58
  pour cut-out: 218.9,-347.8 219.17,-347.52 327.05,-347.52 342.87,-363.35 342.87,-472.76 335.43,-480.2 225.43,-480.2 218.9,-473.66

## Silkscreen, mask and mechanical layers (free items; w line width, h text height)
Top Overlay:
  lines w5: 365.35,-134.65 381.46,-150.75 ; 396.83,-135.37 381.46,-150.75 ; 470.28,-62.17 486.38,-46.06 ; 471,-30.69 486.38,-46.06 ; 486.61,-46.06 486.38,-46.06 ; 381.46,-150.75 381.46,-150.98 381.46,-46.06 486.38,-46.06
  text "Y" at 523.7,-69.25 h40
  text "X" at 399.53,-204.29 h40
Bottom Overlay:
  text "SWCLK" at 319.8,-1837.28 h30 r90
  text "3.3V" at 379.41,-1839.61 h30 r90
  text "GND" at 260.2,-1842.44 h30 r90
  text "SWD" at 201.69,-1847.64 h30 r90
  text "VCC_IN" at 2181.89,-2154.09 h30 r90
  text "GND" at 1524.41,-2156.77 h30 r90
  text "GND" at 1905.59,-2158.07 h30 r90
  text "VBAT" at 1794.72,-2179.49 h30 r90
  text "VBAT" at 646.3,-2224.25 h30 r90
  text "RXD3" at 145.87,-2231.54 h30 r90
  text "GND" at 1232.52,-2265.75 h30 r90
  text "GND" at 864.29,-2267.32 h30 r90
  text "5V2" at 1345.04,-2268.11 h30 r90
  text "5V1" at 975.71,-2271.02 h30 r90
Mechanical 1:
  circle w5: c2303.15,-59.06 r47.24
  circle w5: c2303.15,-2303.15 r47.24
  circle w5: c59.06,-2303.15 r47.24
  circle w5: c59.06,-59.06 r47.24
  lines w5: 0,-2362.2 0,0 2362.2,0 2362.2,-2362.2 0,-2362.2

## Text inside footprints (layer, text, board x,y; h text height)
BATT: Bottom Overlay "+" at 596,-1750 h40 r270